# Altium PCB PCB1.PcbDoc
Units mm, origin at the board's own origin, x right, y up, seen from the top; angles counter-clockwise.
Board outline 47.88 x 23.75 mm, 2 copper layers (Top Layer, Bottom Layer); 41 components, 34 nets, 179 pads, 27 vias.
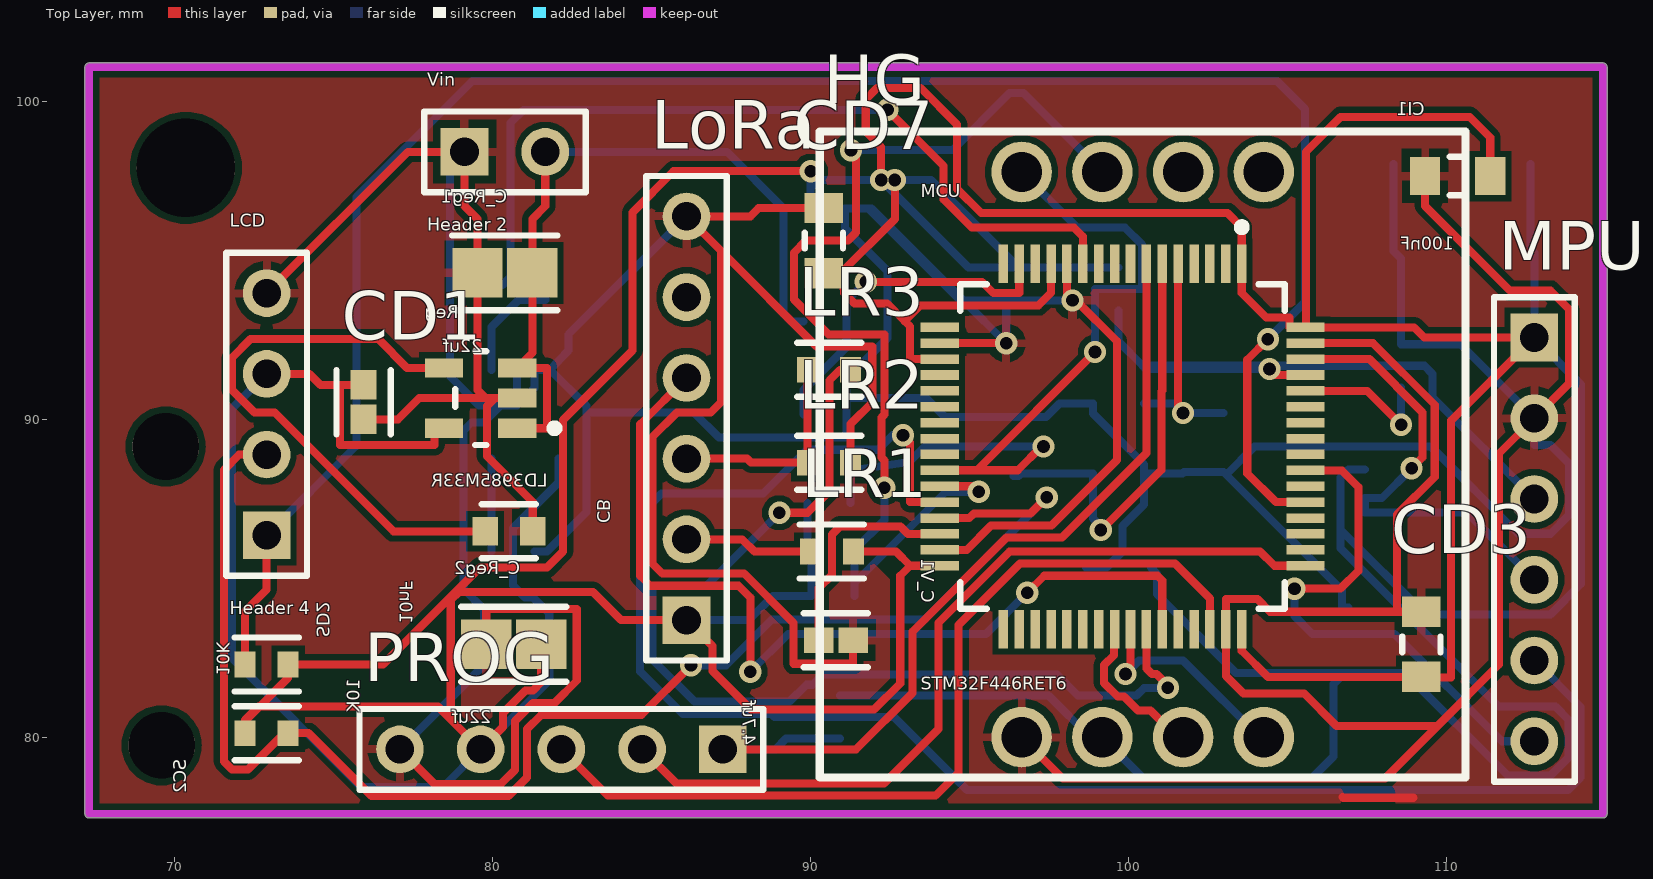
[diagram p0: Top Layer view]
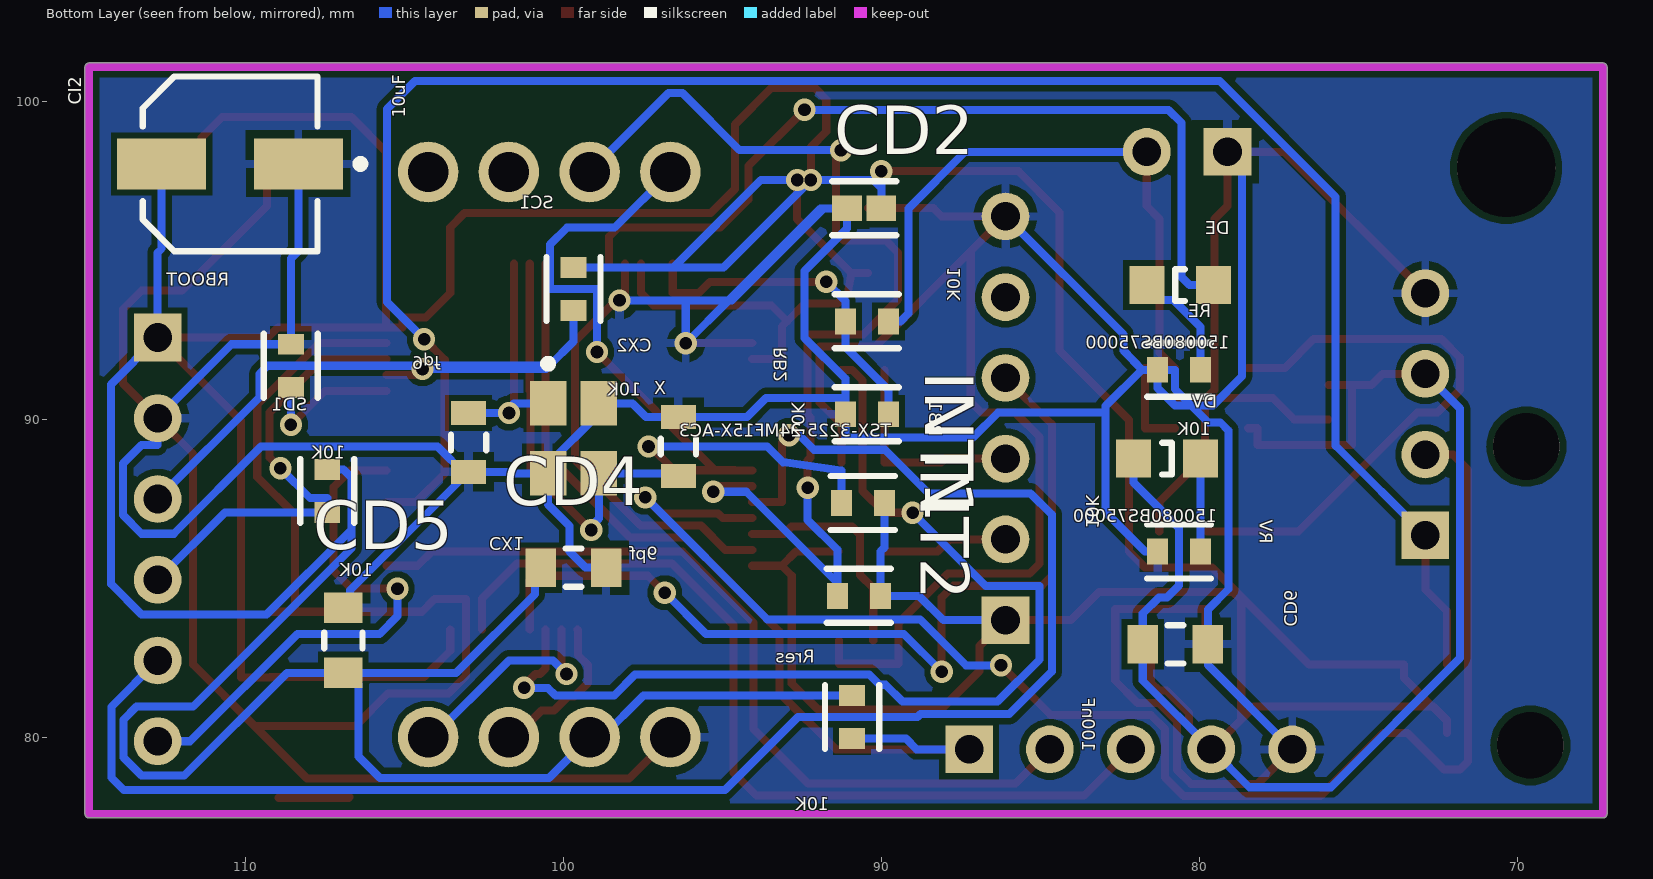
[diagram p1: Bottom Layer view, seen from below]
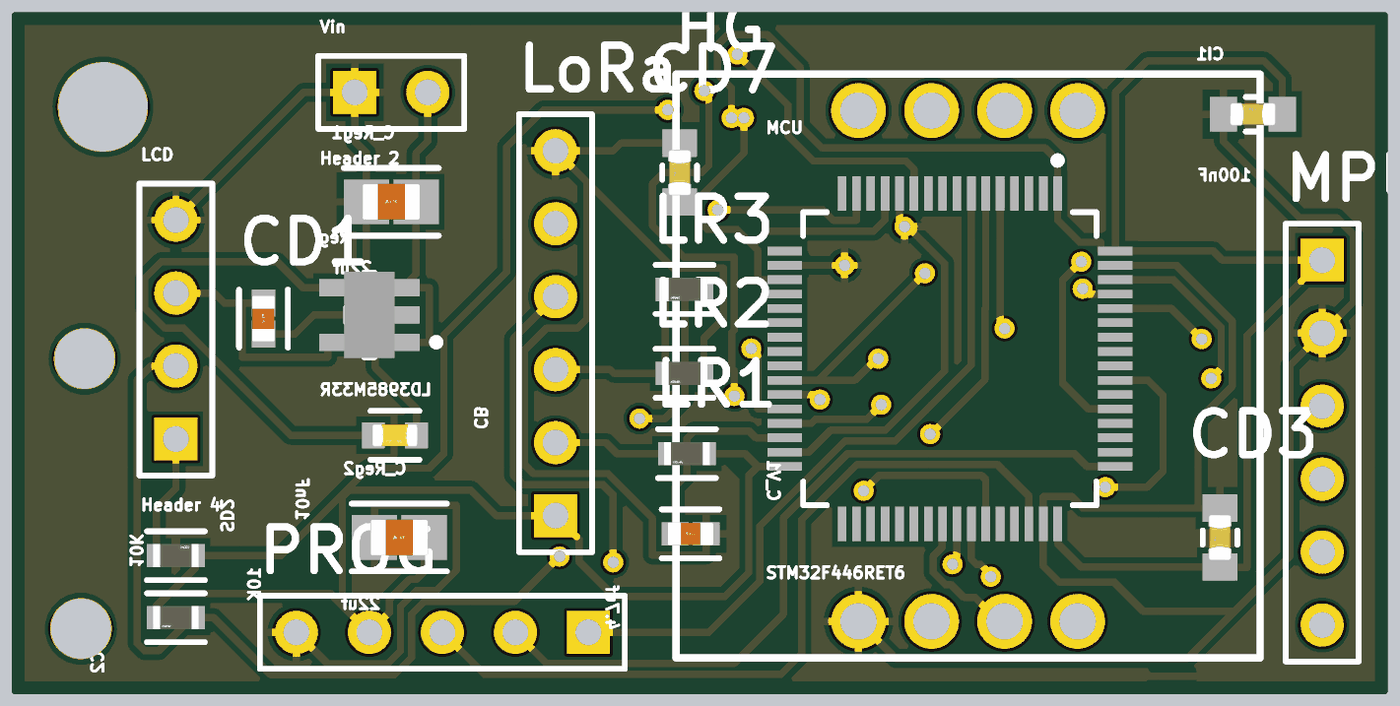
[diagram p2: 3D render of the assembled board from above, using the file's embedded part models]
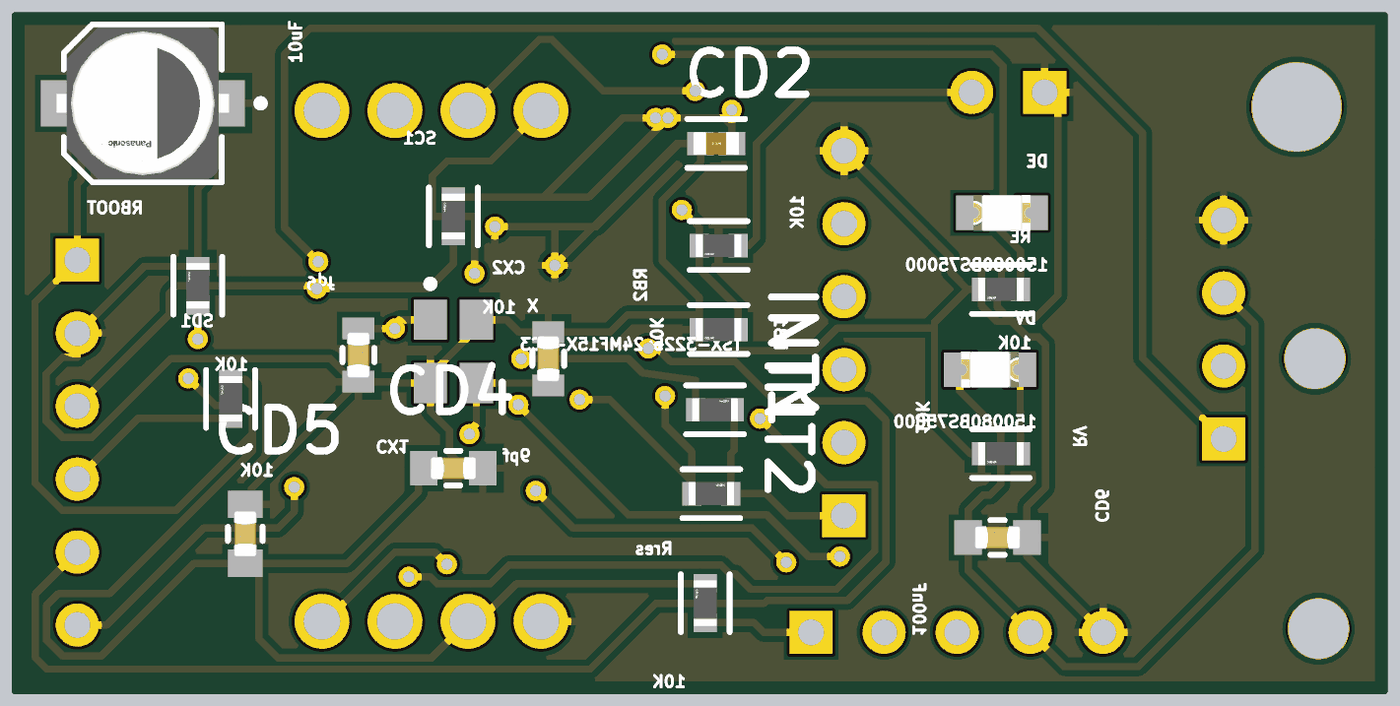
[diagram p3: 3D render of the assembled board from below, using the file's embedded part models]

## Layer stack, top to bottom
Top Solder: solder mask 0.0102, Solder Resist, Dk 3.5
Top Layer: signal copper 0.0356
Dielectric 1: dielectric 0.32, FR-4, Dk 4.8
Bottom Layer: signal copper 0.0356
Bottom Solder: solder mask 0.0102, Solder Resist, Dk 3.5

## Board outline
67.31,77.47 cw(c67.31,77.597) 67.183,77.597 67.183,101.092 cw(c67.31,101.092) 67.31,101.219 114.935,101.219 cw(c114.935,101.092) 115.062,101.092 115.062,77.597 cw(c114.935,77.597) 114.935,77.47

## Design rules (kind name [scope] priority, off if disabled: settings)
Clearance [All] p1: gap=0.2 ignorepadtopadclearanceinfootprint=FALSE except(0.127: Arc-Arc Arc-Track Track-Track SMDPad-SMDPad)
PolygonConnect [All] p1: connectstyle=Relief reliefconductorwidth=0.254 reliefentries=4 polygonreliefangle="90 Angle" airgapwidth=0.254
RoutingVias [All] p1: holewidth=0.4 width=0.7 viastyle="Through Hole" minholewidth=0.4 minwidth=0.7 maxholewidth=0.4 maxwidth=0.7
SolderMaskExpansion [All] p1: expansion=0.102 istentingtop=FALSE
Width [All] p1: maxlimit=0.5 minlimit=0.254 preferedwidth=0.254
30 further rules are at their usual default settings.

## Components (designator, comment, footprint, x,y, rotation, side; value= is the part's Value field where it differs from the comment)
C_Reg1 "22uf" FP-C2012-125-0_2-IPC_A 80.391,94.615 r0 top
C_Reg2 "22uf" FP-C2012-125-0_2-IPC_A 80.67,82.931 r0 top
C_V1 "4.7uf" FP-C1608-080-0_1-IPC_C 90.805,83.058 r0 top
CB "10nF" FP-CC0603-DA-MFG 80.518,86.487 r0 top value="10 nF"
CD1 "4.7uf" FP-C1608-080-0_1-IPC_C 75.946,90.551 r270 top
CD2 "4.7uf" FP-C1608-080-0_1-IPC_C 90.551,96.647 r0 bottom
CD3 "100nF" FP-CGA3E-0_3-0_1-IPC_A 109.22,82.931 r90 top
CD4 "100nF" FP-CGA3E-0_3-0_1-IPC_A 99.695,85.344 r180 bottom
CD5 "100nF" FP-CGA3E-0_3-0_1-IPC_A 106.934,83.058 r90 bottom
CD6 "100nF" FP-CGA3E-0_3-0_1-IPC_A 80.763,82.931 r180 bottom
CD7 "100nF" FP-CGA3E-0_3-0_1-IPC_A 90.424,95.631 r90 top
CI1 "100nF" FP-CGA3E-0_3-0_1-IPC_A 110.363,97.663 r0 top
CI2 "10uF" FP-SC-MFG 110.499,98.044 r0 bottom
CX1 "9pf" FP-CGA3E-0_3-0_1-IPC_B 102.997,89.281 r270 bottom
CX2 "9pf" FP-CGA3E-0_3-0_1-IPC_B 96.393,89.154 r90 bottom
DE "150080BS75000" 0805_A 80.611,94.234 r180 bottom
DV "150080BS75000" 0805_A 81.026,88.773 r0 bottom
HG "Header 4X2" PCBComponent_1 100.457,88.9 r0 top
INT1 "10K" FP-RC0603-0_55-IPC_C 90.593,87.376 r180 bottom
INT2 "10K" FP-RC0603-0_55-IPC_C 90.72,84.455 r180 bottom
LCD "Header 4" HDR1X4 72.898,86.36 r90 top
LoRa "Header 6" HDR1X6 86.106,83.693 r90 top
LR1 "10K" FP-RC0603-0_55-IPC_C 90.678,85.852 r180 top
LR2 "10K" FP-RC0603-0_55-IPC_C 90.593,88.646 r180 top
LR3 "4.7K" FP-RC0603-0_55-IPC_C 90.593,91.567 r180 top
MCU "STM32F446RET6" FP-LQFP64-5W-MFG 99.822,89.154 r270 top
MPU "Header 6" HDR1X6 112.776,92.583 r270 top
PROG "Programmer" HDR1X5 87.249,79.629 r180 top
RB1 "10K" FP-RC0603-0_55-IPC_C 90.466,90.17 r0 bottom
RB2 "10K" FP-RC0603-0_55-IPC_C 90.466,93.091 r0 bottom
RBOOT "10K" FP-RC0603-0_55-IPC_C 108.585,91.694 r90 bottom
RE "10K" FP-RC0603-0_55-IPC_C 80.645,91.567 r0 bottom
Reg "LD3985M33R" FP-SOT23-5L-7049676-MFG 79.629,90.678 r180 top
Rres "10K" FP-RC0603-0_55-IPC_C 90.932,80.645 r90 bottom
RV "10K" FP-RC0603-0_55-IPC_C 80.645,85.852 r0 bottom
SC1 "10K" FP-RC0603-0_55-IPC_C 99.695,94.107 r90 bottom
SC2 "10K" FP-RC0603-0_55-IPC_C 72.898,80.137 r180 top
SD1 "10K" FP-RC0603-0_55-IPC_C 107.442,87.757 r90 bottom
SD2 "10K" FP-RC0603-0_55-IPC_C 72.898,82.296 r0 top
Vin "Header 2" HDR1X2 79.121,98.425 r0 top
X "TSX-3225 24MF15X-AC3" EPSON-TSX-3225_V 99.695,89.408 r270 bottom

## Footprints (in the part's own frame and the unit in brackets; to place one, negate y for a bottom-side part, rotate by r counter-clockwise, add the part's x,y. Pads: shape width x height; smd on the part's side, far side on the other; paste and mask are expansions set on the pad)
0805_A [mm] "Chip LED, 2-Leads, Body 2.0x1.3mm, IPC Medium Density"
  rect 1.1x1.2 smd: 1(-1.05,0) 2(1.05,0)
  silkscreen extent -0.15,-0.5 0.15,0.5, body extent -1,-0.63 1,0.63, height 0.68
EPSON-TSX-3225_V [mm] "SMD, 4-Leads, Body 3.2x2.5mm"
  rect 1.4x1.15 smd: 1(-1.1,-0.8) 2(1.1,-0.8) 3(1.1,0.8) 4(-1.1,0.8)
  silkscreen extent -2.47,-0.93 -2.23,-0.68, body extent -1.6,-1.25 1.6,1.25, height 0.6
FP-C1608-080-0_1-IPC_C [mm]
  rect 0.931x0.812 smd paste+0 mask+0: 1(-0.541,0) 2(0.541,0)
  silkscreen extent -1.01,-0.85 1.01,0.85, body extent -0.8,-0.4 0.8,0.4, height 0.9
FP-C2012-125-0_2-IPC_A [mm]
  rect 1.578x1.556 smd paste+0 mask+0: 1(-0.864,0) 2(0.864,0)
  silkscreen extent -1.65,-1.18 1.65,1.18, body extent -1,-0.63 1,0.63, height 1.45
FP-CC0603-DA-MFG [mm]
  rect 0.8x0.9 smd paste+0 mask+0: 1(-0.75,0) 2(0.75,0)
  silkscreen extent -0.85,-0.85 0.85,0.85, body extent -0.8,-0.4 0.8,0.4, height 0.9
FP-CGA3E-0_3-0_1-IPC_A [mm]
  rect 0.956x1.206 smd paste+0 mask+0: 1(-1.025,0) 2(1.025,0)
  silkscreen extent -0.25,-0.6 0.25,0.6, body extent -2,-1.1 2,1.1, height 0.25
FP-CGA3E-0_3-0_1-IPC_B [mm]
  rect 0.756x1.106 smd paste+0 mask+0: 1(-0.925,0) 2(0.925,0)
  silkscreen extent -0.25,-0.55 0.25,0.55, body extent -0.8,-0.4 0.8,0.4, height 1.1
FP-LQFP64-5W-MFG [mm]
  rect 1.2x0.3 smd paste+0 mask+0: 1(-5.75,3.75) 2(-5.75,3.25) 3(-5.75,2.75) 4(-5.75,2.25) 5(-5.75,1.75) 6(-5.75,1.25) 7(-5.75,0.75) 8(-5.75,0.25) 9(-5.75,-0.25) 10(-5.75,-0.75) 11(-5.75,-1.25) 12(-5.75,-1.75) 13(-5.75,-2.25) 14(-5.75,-2.75) 15(-5.75,-3.25) 16(-5.75,-3.75) 33(5.75,-3.75) 34(5.75,-3.25) 35(5.75,-2.75) 36(5.75,-2.25) 37(5.75,-1.75) 38(5.75,-1.25) 39(5.75,-0.75) 40(5.75,-0.25) 41(5.75,0.25) 42(5.75,0.75) 43(5.75,1.25) 44(5.75,1.75) 45(5.75,2.25) 46(5.75,2.75) 47(5.75,3.25) 48(5.75,3.75)
  rect 0.3x1.2 smd paste+0 mask+0: 17(-3.75,-5.75) 18(-3.25,-5.75) 19(-2.75,-5.75) 20(-2.25,-5.75) 21(-1.75,-5.75) 22(-1.25,-5.75) 23(-0.75,-5.75) 24(-0.25,-5.75) 25(0.25,-5.75) 26(0.75,-5.75) 27(1.25,-5.75) 28(1.75,-5.75) 29(2.25,-5.75) 30(2.75,-5.75) 31(3.25,-5.75) 32(3.75,-5.75) 49(3.75,5.75) 50(3.25,5.75) 51(2.75,5.75) 52(2.25,5.75) 53(1.75,5.75) 54(1.25,5.75) 55(0.75,5.75) 56(0.25,5.75) 57(-0.25,5.75) 58(-0.75,5.75) 59(-1.25,5.75) 60(-1.75,5.75) 61(-2.25,5.75) 62(-2.75,5.75) 63(-3.25,5.75) 64(-3.75,5.75)
  silkscreen extent -7.02,-5.1 5.1,5.1
FP-RC0603-0_55-IPC_C [mm]
  rect 0.659x0.812 smd paste+0 mask+0: 1(-0.677,0) 2(0.677,0)
  silkscreen extent -1.01,-0.85 1.01,0.85, body extent -0.8,-0.4 0.8,0.4, height 0.55
FP-SC-MFG [mm]
  rect 2.8x1.6 smd paste+0 mask+0: 1(-2.15,0) 2(2.15,0)
  silkscreen extent -4.22,-2.75 2.75,2.75, body extent -3,-2.65 3,2.65, height 5.8
FP-SOT23-5L-7049676-MFG [mm]
  rect 1.2x0.6 smd paste+0 mask+0: 1(-1.15,0.95) 2(-1.15,0) 3(-1.15,-0.95) 4(1.15,-0.95) 5(1.15,0.95)
  silkscreen extent -2.45,-1.47 0.8,1.47, body extent -0.87,-1.5 0.88,1.5, height 1.45
HDR1X2 [mm] "Connector; Header; 2 Position"
  rect 1.5x1.5 hole 0.9: 1(0,0)
  round 1.5 hole 0.9: 2(2.54,0)
  silkscreen extent -1.27,-1.27 3.81,1.27
HDR1X4 [mm] "Connector; Header; 4 Position"
  rect 1.5x1.5 hole 0.9: 1(0,0)
  round 1.5 hole 0.9: 2(2.54,0) 3(5.08,0) 4(7.62,0)
  silkscreen extent -1.27,-1.27 8.89,1.27
HDR1X5 [mm] "Connector; Header; 5 Position"
  rect 1.5x1.5 hole 0.9: 1(0,0)
  round 1.5 hole 0.9: 2(2.54,0) 3(5.08,0) 4(7.62,0) 5(10.16,0)
  silkscreen extent -1.27,-1.27 11.43,1.27
HDR1X6 [mm] "Connector; Header; 6 Position"
  rect 1.5x1.5 hole 0.9: 1(0,0)
  round 1.5 hole 0.9: 2(2.54,0) 3(5.08,0) 4(7.62,0) 5(10.16,0) 6(12.7,0)
  silkscreen extent -1.27,-1.27 13.97,1.27
PCBComponent_1 [mil]
  round 75 hole 50: 1(-150,-350) 2(-50,-350) 3(50,-350) 4(150,-350) 5(-150,350) 6(-50,350) 7(50,350) 8(150,350)
  round 74 hole 50: 1(-150,-350) 2(-50,-350) 3(50,-350) 4(150,-350) 5(-150,350) 6(-50,350) 7(50,350) 8(150,350)
  silkscreen extent -400,-400 400,400

## Part data
C_Reg1 C_Reg2: library part CMP-08246-007072-1, "Multilayer Ceramic Capacitors 22μF ±20% 16V X6S SMD 0805", Capacitance=22uF, Case Code (Imperial)=0805, Case Code (Metric)=2012, Dielectric=X6S, Dielectric Material=Ceramic, Max Operating Temperature=105°C, Min Operating Temperature=-55°C, Package Quantity=2000, Tolerance=20%, Voltage Rating=16V, Case/Package=0805, Height=1.25mm, Lead Free="Lead Free", Length=0.079inch, Mount="Surface Mount", Packaging="Tape and Reel", REACH SVHC="No SVHC", RoHS Compliant=Yes, Series=C, Termination=SMD/SMT, Thickness=0.057inch, Voltage Rating (DC)=16V, Weight=0.000194oz, Width=0.049inch
C_V1 CD1 CD2: library part CMP-2000-04981-2, "Multilayer Ceramic Capacitors 4.7μF ±10% 16V X5R SMD 0603", Capacitance=4.7uF, Case Code (Imperial)=0603, Case Code (Metric)=1608, Dielectric=X5R, Dielectric Material=Ceramic, Max Operating Temperature=85°C, Min Operating Temperature=-55°C, Package Quantity=1, Tolerance=10%, Voltage=16V, Case/Package=0603, Construction=Flat, Depth=0.8mm, Height=0.8mm, Lead Free="Lead Free", Length=1.6mm, Mount="Surface Mount", Packaging="Tape and Reel", REACH SVHC="No SVHC", RoHS Compliant=Yes, Series=C, Termination=SMD/SMT, Thickness=0.035inch, Voltage Rating=16V, Voltage Rating (DC)=16V, Weight=7.1E-05oz, Width=0.031inch
CB: library part CMP-2100-03600-2, "CAP CER 10000PF 50V X7R 0603", Capacitance="10 nF", Manufacturer=YAGEO, Manufacturer Part Number=CC0603KRX7R9BB103, Package=CC0603-DA, Temperature="-55°C to +125°C", Temperature Characteristic=X7R, Temperature Coefficient=15%, Temperature Range High=+125°C, Temperature Range Low=-55°C, Tolerance=0.1, Voltage="50 V", Automotive=No, Category=Cap, ComponentLink2Description=Datasheet, ComponentLink2URL=http://www.yageo.com/documents/recent/UPY-GPHC_X7R_6.3V-to-50V_18.pdf, Device Class L1="Passive Components", Device Class L2=Capacitors, Device Class L3="Ceramic Capacitors", Digikey Description="CAP CER 10000PF 50V X7R 0603", Footprint Url=http://www.yageo.com/exep/pages/download/literatures/UPY-C_GEN_24.pdf, Height=0.9mm, Lead Free=Yes, Material=Ceramic, Mouser Description="Multilayer Ceramic Capacitor, CC Series, 0.01 - F, - 10%, X7R, 50 V, 0603 [1608 Metric]", Octopart=https://octopart.com/cc0603krx7r9bb103-yageo-192938, RoHS=TRUE, Voltage Rating="50 V"
CD3 CD4 CD5 CD6 CD7 CI1: library part CMP-2000-07546-2, "Cap Ceramic 100nF 50V X7R 10% Pad SMD 0603 +125°C Automotive T/R", Case Code (Imperial)=0603, Case Code (Metric)=1608, Dielectric=X7R, Max Operating Temperature=125°C, Min Operating Temperature=-55°C, Package Quantity=1, Ratings=AEC-Q200, Tolerance=10%, Voltage=50V, Capacitance=100nF, Case/Package=0603, Composition=Ceramic, Depth=0.8mm, Height=0.8mm, Lead Free="Lead Free", Length=1.6mm, Mount="Surface Mount", Packaging="Tape and Reel", Radiation Hardening=No, REACH SVHC="No SVHC", Termination=SMD/SMT, Thickness=0.035inch, Voltage Rating=50V, Voltage Rating (DC)=50V, Weight=7.1E-05oz, Width=0.8mm
CI2: library part CMP-05427-000087-1, "CAP ALUM 10UF 20% 35V SMD", Case/Package=Radial, Leakage Current=3uA, Max Operating Temperature=85°C, Min Operating Temperature=-40°C, Package Quantity=1, Ripple Current=30mA, Tolerance=20%, Voltage=35V, Capacitance=10uF, Construction=Cylindrical, Contact Plating=Tin, Diameter=5mm, Height=5.4mm, Height - Seated (Max)=0.213inch, Lead Length=2.2mm, Lead Pitch=1.5mm, Length=5.5mm, Life (Hours)=2000Hour, Mount="Surface Mount", Number of Pins=2, Packaging="Tape and Reel", Radiation Hardening=No, REACH SVHC="No SVHC", Ripple Current (AC)=30mA, RoHS Compliant=Yes, Series=S, Termination=SMD/SMT, Voltage Rating=35V, Voltage Rating (DC)=35V, Width=5.3mm
CX1 CX2: library part CMP-08246-000963-1, "Cap Ceramic 9pF 50V C0G 0.5pF Pad SMD 0603 +125°C Automotive T/R", Capacitance=9pF, Case Code (Imperial)=0603, Case Code (Metric)=1608, Dielectric=C0G, Max Operating Temperature=125°C, Min Operating Temperature=-55°C, Package Quantity=4000, Ratings=AEC-Q200, Voltage Rating=50V, Case/Package=0603, Composition=Ceramic, Depth=0.8mm, Height=0.8mm, Length=1.6mm, Mount="Surface Mount", Packaging="Tape and Reel", REACH SVHC="No SVHC", Termination=SMD/SMT, Thickness=0.035inch, Voltage Rating (DC)=50V, Weight=7.1E-05oz, Width=0.031inch
DE DV: library part CMP-1426-00008-1, "SMD mono-color Chip LED, WL-SMCW, Blue", Color=Blue, Manufacturer="Wuerth Elektronik", ComponentLink1Description="Manufacturer URL", ComponentLink1URL=http://www.we-online.com, ComponentLink2Description=Datasheet, ComponentLink2URL=http://katalog.we-online.com/led/datasheet/150080BS75000.pdf, PackageReference=0805_A, PartNumber=150080BS75000
HG: "Header, 4-Pin, Dual row", LatestRevisionDate=17-Jul-2002, LatestRevisionNote="Re-released for DXP Platform.", Publisher="Altium Limited"
INT1 INT2 LR1 LR2 LR3 RB1 RB2 RBOOT RE Rres RV SC1 SC2 SD1 SD2: library part CMP-2100-03664-2, "RES 10K OHM 1% 1/10W 0603", Case Code (Imperial)=0603, Case Code (Metric)=1608, Max Operating Temperature=155°C, Max Power Dissipation=100mW, Min Operating Temperature=-55°C, Resistance=10kR, Resistance Tolerance=1%, Resistor Type="Thick Film", Temperature Coefficient=100ppm/°C, Voltage Rating=75V, Voltage Rating (DC)=50V, Case/Package=0603, Construction=Rectangular, Depth=0.8mm, Features="Moisture Resistant", Height=0.45mm, Lead Free="Lead Free", Lead Pitch=0.3mm, Length=1.6mm, Military Standard=Not, Number of Pins=2, Number of Terminations=2, Packaging="Tape and Reel", Power Rating=100mW, RoHS Compliant=Yes, Series=RC, Size Code=0603, Termination=SMD/SMT, Tolerance=1%, Weight=7.1E-05oz, Width=0.8mm
LCD: "Header, 4-Pin", LatestRevisionDate=17-Jul-2002, LatestRevisionNote="Re-released for DXP Platform.", Publisher="Altium Limited"
LoRa MPU: "Header, 6-Pin", LatestRevisionDate=17-Jul-2002, LatestRevisionNote="Re-released for DXP Platform.", Publisher="Altium Limited"
MCU: library part CMP-12105-000007-1, "IC MCU 32BIT 512KB FLASH 64LQFP", Ambient Temperature Range High=+85°C, Ambient Temperature Range Low=-40°C, Frequency=180MHz, Manufacturer=ST, Max Junction Temp=+105°C, Max Supply Voltage=3.6V, Min Supply Voltage=1.7V, Package=LQFP64-5W, Temperature="-40°C to +105°C", Automotive=No, Category=IC, ComponentLink2Description=Datasheet, ComponentLink2URL=https://www.st.com/en/microcontrollers-microprocessors/stm32f446re.html, Core Architecture="ARM Cortex-M4", Data Bus Width=32bits, Device Class L1="Integrated Circuits (ICs)", Device Class L2="Embedded Processors and Controllers", Device Class L3=Microcontrollers, Digikey Description="IC MCU 32BIT 512KB FLASH 64LQFP", Height=1.6mm, Interface=I2C,SPI,UART,USART,CAN,USB,LIN,IrDA,I2S,Other, Ipc Land Pattern Name=QFP50P1200X1200X160-64, Lead Free=Yes, Manufacturer Part Number=STM32F446RET6, Memory Size=512KBytes, Memory Type=FLASH, Mouser Description="ARM Microcontrollers - MCU High-performance and DSP with FP, ARM Cortex-M4 MCU with 512 Kbytes Flash, 180 MHz CPU, Art Accelerator, SDRAM", Number Of A/D Converters=3, Number Of Adc Channels=16, Number Of Cores=1, Number Of I2C Channels=4, Number Of I/Os=50, Number Of Pwm Channels=32, Number Of Spi Channels=4, Number Of Timers/Counters=14, Number Of Uart Channels=6, Number Of Usb Channels=2, Octopart=https://octopart.com/stm32f446ret6-stmicroelectronics-52642920, Ram Size=128KBytes, RoHS=TRUE, Standoff Height=0.05mm, Temperature Range High=+105°C, Temperature Range Low=-40°C
PROG: library part "Header 5", "Header, 5-Pin", LatestRevisionDate=17-Jul-2002, LatestRevisionNote="Re-released for DXP Platform.", Publisher="Altium Limited"
Reg: library part CMP-0244-00328-2, "IC REG LINEAR 3.3V 150MA SOT23-5", Case/Package=SOT-23, Dropout Voltage=60mV, Input Bias Current=85uA, Max Input Voltage=6V, Max Operating Temperature=125°C, Max Output Current=150mA, Min Current Limit=300mA, Min Input Voltage=2.5V, Min Operating Temperature=-40°C, Min Output Voltage=3.3V, Output Voltage Accuracy=2%, Package Quantity=1, Quiescent Current=150uA, Accuracy=2%, Height=1.3mm, Lead Free="Lead Free", Length=3mm, Mount="Surface Mount", Number Of Outputs=1, Number of Pins=5, Number of Regulators=1, Output Current=150mA, Output Type=Fixed, Output Voltage=3.3V, Packaging="Tape and Reel", Polarity=Positive, Radiation Hardening=No, Width=1.75mm
Vin: "Header, 2-Pin", LatestRevisionDate=17-Jul-2002, LatestRevisionNote="Re-released for DXP Platform.", Publisher="Altium Limited"
X: library part CMP-2000-07333-1, "MHz Range Crystal, 24 MHz, -40 to 85 degC, 4-Pin SMD, RoHS, Tape and Reel", Frequency=24MHz, Frequency Stability=10PPM, Load Capacitance=9pF, Manufacturer=Epson, Operating Temperature Range=-40Cto+85C, Package / Case=3.2mmx2.5mm, Package Description="4-Pin Surface Mount Device, Body 3.2 x 2.5 mm", Package Reference=TSX-3225, Brand=EpsonTiming, Datasheet URL=https://support.epson.biz/td/api/doc_check.php?dl=brief_FA-238V_en.pdf, Datasheet Version=12/2015, Drive Level=200uW, ESR=40Ohms, Factory Pack Quantity=250, Height=0.6mm, Length=3.2mm, Manufacturer URL=https://www.eea.epson.com/, Mounting Style=SMD/SMT, Mounting Technology=SurfaceMount, Packaging=Reel, Product Category=Crystals, RoHS=True, Series=TSX-3225, Termination Style=SMD/SMT, Tolerance=10PPM, Type=Crystal, Unit Weight=0.000564oz, Width=2.5mm

## Free pads (board coordinates)
  oval 3.1x1.524 hole 3.1: 3(70.358,97.917)
  oval 2.1x1.524 hole 2.1: 4(69.723,89.154) 5(69.596,79.756)

## Via types
v1: diameter 0.7, hole 0.4, Top Layer to Bottom Layer, 27 vias

## Nets (pads, with @x,y where several pads share a name; then routed paths per layer and width w, separated by ;. In a path a pad name is that pad's centre, name@x,y a point inside that pad or via, vN(x,y) a via of type N, cw(c..) or ccw(c..) an arc to the next point about the centre after c; other vN are vias at no path point)
+3V3: C_Reg2.2 CD1.1 CD2.1 CD3.1 CD4.1 CD5.1 CD6.1 CD7.1 CI1.2 CI2.2 DV.2 HG.2 INT1.2 INT2.2 LCD.3 LoRa.1 LR1.1 MCU.1 MCU.13 MCU.19 MCU.32 MCU.48 MCU.64 MPU.1 PROG.4 Reg.5 Rres.2 SC1.2 SC2.2 SD1.2 SD2.2 | length 284.6
  Top Layer w0.254: SC2.2 SC2.2@72.221,80.518 ; LCD.3 74.244,91.44 74.593,91.092 75.209,91.092 ; CD1.1 75.209,91.092 ; Reg.5 78.181,89.728 78.181,89.205 75.209,89.205 75.209,91.092 ; C_Reg2.2 81.534,81.737 81.28,81.483 81.041,81.483 80.33,80.772 80.33,80.33 PROG.4 78.689,80.569 ; v1(90.01,97.815) 85.7,97.815 84.404,96.52 84.404,92.177 82.22,89.992 82.22,85.852 81.712,85.344 79.604,85.344 76.556,82.296 SD2.2 73.575,81.871 72.678,80.975 ; CD7.1 CD7.1@90.948,94.606 ; LR1.1 92.694,85.852 93.142,85.404 ; v1(92.227,97.536) 92.227,98.577 91.745,99.06 91.745,100.076 92.1,100.432 93.472,100.432 94.615,99.289 94.615,97.257 95.377,96.495 103.124,96.495 103.572,96.047 MCU.1 103.572,93.98 104.343,93.209 105.071,93.209 105.071,92.904 MCU.64 MCU.64@105.588,92.904 ; v1(92.659,97.536) 92.659,96.317 CD7.1@90.948,94.606 ; MCU.32 93.142,85.404 ; MCU.19 93.142,91.904 93.142,92.924 92.971,93.095 ; MCU.13 97.572,93.991 97.177,93.596 93.472,93.596 92.971,93.095 ; MCU.48 103.572,82.728 104.394,81.906 CD3.1 109.22,81.89 110.16,81.89 110.16,89.967 MPU.1 109.312,92.583 108.991,92.904 MCU.64@105.588,92.904 ; CI1.2 111.388,98.873 110.744,99.517 106.68,99.517 105.588,98.425 MCU.64@105.588,92.904 ; SC2.2@72.221,80.518 72.678,80.975 ; SC2.2@72.221,80.518 72.221,80.552 72.644,80.975 72.678,80.975 ; 72.678,80.975 78.283,80.975 78.689,80.569 ; 78.689,80.569 78.689,84.328 78.943,84.582 83.16,84.582 84.049,83.693 LoRa.1 86.925,82.874 86.925,82.095 88.138,80.882 92.008,80.882 92.828,81.703 92.828,85.09 93.142,85.404 ; CD7.1@90.948,94.606 91.068,93.98 91.393,93.655 92.411,93.655 92.971,93.095
  Bottom Layer w0.254: LCD.3 71.806,90.348 71.806,82.499 75.87,78.435 78.435,78.435 PROG.4 81.788,81.788 CD6.1 81.788,83.896 81.28,84.404 81.026,84.404 80.645,84.785 80.645,86.589 82.076,88.02 DV.2 ; LoRa.1 88.062,83.693 88.824,84.455 INT2.2 90.043,85.852 89.916,85.979 INT1.2 ; CD2.1 90.01,97.282 ; v1(90.01,97.815) 90.01,97.282 ; Rres.2 97.494,81.322 98.806,80.01 99.187,80.01 100.466,78.731 105.782,78.731 106.458,79.407 106.458,81.682 CD5.1@106.809,82.033 ; SC1.2 96.554,94.784 ; CD4.1 100.911,85.153 100.911,84.509 103.387,82.033 CD5.1@106.809,82.033 ; SD1.2 106.934,88.434 106.68,88.18 106.68,86.538 ; CI2.2 112.649,95.377 112.776,95.25 MPU.1 114.249,91.11 114.249,84.836 113.284,83.871 109.347,83.871 106.68,86.538 ; 90.01,97.282 90.264,97.536 v1(92.227,97.536) ; v1(92.227,97.536) 94.98,94.784 96.554,94.784 ; v1(92.227,97.536) v1(92.659,97.536) 93.802,97.536 96.554,94.784 ; 106.68,86.538 106.68,85.954 111.658,80.975 113.436,80.975 113.853,80.559 113.853,79.375 113.284,78.806 111.939,78.806 108.712,82.033 CD5.1 CD5.1@106.809,82.033
ADC0: MCU.15 RB1.1 RB2.2 | length 10.9
  Top Layer w0.254: v1(91.745,94.336) 95.402,94.336 95.761,93.977 96.572,93.977 MCU.15
  Bottom Layer w0.254: RB1.1 89.789,90.932 91.142,92.285 RB2.2 91.142,93.733 v1(91.745,94.336)
GND: C_Reg1.1 C_Reg2.1 C_V1.2 CB.2 CD1.2 CD2.2 CD3.2 CD4.2 CD5.2 CD6.2 CD7.2 CI1.1 CI2.1 CX1.2 CX2.2 HG.1 LCD.4 LoRa.6 LR2.1 MCU.12 MCU.18 MCU.31 MCU.47 MCU.63 MPU.2 PROG.5 RB1.2 RBOOT.2 RE.2 Reg.2 RV.2 Vin.1 X.2 X.4 | length 280.1
  Top Layer w0.254: LCD.4 77.343,98.425 Vin.1 79.121,96.723 79.527,96.317 C_Reg1.1 79.527,90.932 79.781,90.678 ; CD1.2 77.031,90.01 77.699,90.678 79.781,90.678 ; PROG.5 78.181,78.537 80.264,78.537 80.711,78.984 80.711,80.518 81.28,81.087 81.951,81.087 82.652,81.788 82.652,84.049 79.806,84.049 C_Reg2.1 ; Reg.2 80.086,90.678 ; CB.2 81.268,87.413 79.832,88.849 79.832,90.424 80.086,90.678 ; CD7.2 88.376,96.656 88.113,96.393 LoRa.6 87.198,95.301 ; LR2.1 91.269,89.864 91.948,90.543 91.948,92.304 90.195,92.304 87.198,95.301 ; C_V1.2 91.346,82.321 89.472,82.321 89.472,83.604 87.92,85.156 85.344,85.156 85.029,85.471 85.029,89.449 85.801,90.221 86.868,90.221 87.198,90.551 87.198,95.301 ; MCU.31 94.921,85.904 95.686,86.669 97.582,86.669 99.644,88.731 99.644,92.468 98.361,93.751 v1(98.247,93.751) 98.072,93.927 MCU.12 ; MCU.18 v1(96.164,92.404) ; HG.1@96.647,80.01 97.942,78.715 108.077,78.715 109.728,80.366 ; MCU.63 107.705,92.404 109.643,90.466 109.643,88.198 108.458,87.013 108.458,83.956 ; CD3.2 108.458,83.956 ; CI1.1 109.338,96.723 112.005,94.056 113.284,94.056 113.868,93.472 113.868,91.135 MPU.2 111.658,88.925 111.658,82.296 109.728,80.366 ; 79.781,90.678 80.086,90.678 ; 108.458,83.956 104.461,83.956 104.064,84.353 103.072,84.353 MCU.47 103.072,81.94 103.631,81.382 105.537,81.382 106.553,80.366 109.728,80.366
  Bottom Layer w0.254: PROG.5 79.738,82.278 CD6.2 79.738,84.023 79.096,84.666 79.096,89.662 79.35,89.916 79.731,89.916 80.264,90.449 ; Vin.1 78.664,97.968 78.664,91.364 79.578,90.449 80.264,90.449 ; RV.2 81.712,85.852 82.956,87.097 82.956,90.221 ; LoRa.6 82.398,92.685 82.398,92.177 81.813,91.567 ; v1(98.247,93.751) 96.164,93.751 ; CD4.2 99.314,85.344 99.822,85.852 99.822,86.655 100.495,87.328 X.2 ; CD5.2 106.72,84.083 106.72,84.633 CX1.2@103.086,88.267 ; CI2.1 108.349,95.308 108.585,95.072 RBOOT.2 110.448,92.371 MPU.2 112.776,89.205 113.284,89.205 113.868,88.621 113.868,86.995 113.284,86.411 112.268,86.411 109.525,89.154 103.973,89.154 CX1.2@103.086,88.267 ; 80.264,90.449 80.772,90.449 81.322,90.999 RE.2 ; 80.264,90.449 80.772,90.957 80.772,91.567 RE.2 ; RE.2 81.788,91.567 81.813,91.567 ; 81.813,91.567 82.956,90.424 82.956,90.221 ; 82.956,90.221 86.335,90.221 87.122,89.433 91.142,89.433 RB1.2 91.142,90.678 ; 91.142,90.678 93.637,90.678 94.236,90.079 CX2.2 97.409,90.079 97.838,90.508 X.4 98.895,90.195 100.495,88.595 X.2 ; 91.142,90.678 91.142,91.288 92.424,92.569 92.424,94.68 91.092,96.012 CD2.2 91.821,96.647 ; 91.821,96.647 91.921,96.647 94.817,93.751 ; 91.821,96.647 94.717,93.751 94.817,93.751 ; 94.817,93.751 96.164,93.751 ; 94.817,93.751 v1(96.164,92.404) 96.164,93.751 ; X.2 101.702,88.308 101.75,88.356 CX1.2 CX1.2@103.086,88.267
INDICATOR: DE.2 MCU.11 | length 27.3
  Top Layer w0.254: v1(92.431,99.746) 94.196,97.981 94.196,96.92 95.079,96.037 98.298,96.037 98.572,95.763 MCU.11
  Bottom Layer w0.254: DE.2 80.315,94.234 80.569,94.488 80.569,99.339 80.975,99.746 v1(92.431,99.746)
"INT 1": HG.5 INT1.1 MCU.26 | length 25.7
  Top Layer w0.254: MCU.26 94.624,88.404 94.624,88.409 95.241,88.409 ; v1(97.333,89.154) 97.27,89.154 96.525,88.409 95.241,88.409 ; v1(98.958,92.126) 95.241,88.409
  Bottom Layer w0.254: INT1.1 91.269,88.401 93.104,88.659 93.599,89.154 v1(97.333,89.154) ; HG.5@96.647,97.79 98.4,96.037 99.898,96.037 100.432,95.504 100.432,94.107 98.958,94.107 v1(98.958,92.126)
"INT 2": HG.6 INT2.1 MCU.27 | length 34.4
  Top Layer w0.254: v1(91.282,98.476) 91.44,98.318 91.44,95.885 91.186,95.631 89.865,95.631 89.484,95.25 89.484,93.777 90.576,92.685 92.329,92.685 92.329,90.162 92.236,90.069 92.236,88.808 92.329,88.715 v1(92.329,87.859) ; MCU.27 95.128,87.904 v1(95.301,87.732)
  Bottom Layer w0.254: v1(91.282,98.476) 94.471,98.476 96.266,100.27 96.707,100.27 HG.6@99.187,97.79 ; INT2.1 91.396,84.869 ; v1(92.329,87.859) 92.329,86.843 91.396,85.91 91.396,84.869 ; v1(95.301,87.732) 94.259,87.732 91.396,84.869
"INT 3": MCU.28 MPU.5 | length 52.9
  Top Layer w0.254: v1(92.913,89.51) 93.142,89.281 93.142,87.404 MCU.28
  Bottom Layer w0.254: v1(92.913,89.51) 92.583,89.51 92.126,89.052 89.891,89.052 88.519,87.681 85.319,87.681 84.648,87.01 84.648,82.078 85.987,80.739 88.781,80.739 88.875,80.645 92.634,80.645 94.929,78.35 113.844,78.35 114.234,78.74 114.234,80.965 MPU.5
"INT 4": MCU.55 MPU.6 | length 16.8
  Top Layer w0.254: v1(105.232,84.684) 106.68,84.684 107.239,85.242 107.239,87.884 106.719,88.404 MCU.55
  Bottom Layer w0.254: v1(105.232,84.684) 105.232,83.82 105.791,83.261 108.382,83.261 111.76,79.883 MPU.6
"INT 5": MCU.56
M_boot: MCU.60 RBOOT.1 | length 4.6
  Top Layer w0.254: MCU.60 107.521,90.904 v1(108.585,89.84)
  Bottom Layer w0.254: v1(108.585,89.84) RBOOT.1
M_C_V: C_V1.1 MCU.30 | length 7.1
  Top Layer w0.254: C_V1.1 90.264,84.702 90.678,85.115 90.678,86.385 90.932,86.639 92.837,86.639 93.072,86.404 MCU.30
M_X1: CX1.1 MCU.5 X.1 | length 7.5
  Top Layer w0.254: MCU.5 101.572,90.361 v1(101.727,90.206)
  Bottom Layer w0.254: X.1 101.575,90.508 v1@101.877,90.206 ; v1(101.727,90.206) v1@101.877,90.206 ; CX1.1 v1@101.877,90.206
M_X2: CX2.1 MCU.6 X.3 | length 13.6
  Top Layer w0.254: v1(99.136,86.529) 99.153,86.529 101.041,88.417 101.041,90.881 101.072,90.912 MCU.6
  Bottom Layer w0.254: CX2.1 96.544,88.229 96.623,88.308 X.3 98.895,86.891 99.136,86.65 v1(99.136,86.529)
MISO: MCU.22
MOSI: MCU.23
NetCB_1: CB.1 Reg.4 | length 18.1
  Top Layer w0.254: Reg.4 77.318,91.628 76.413,92.532 72.39,92.532 71.806,91.948 71.806,90.932 72.517,90.221 73.152,90.221 76.886,86.487 CB.1
NetDE_1: DE.1 RE.1 | length 3.9
  Bottom Layer w0.254: RE.1 79.968,92.913 80.823,93.768 81.661,93.768 DE.1
NetDV_1: DV.1 RV.1 | length 2.9
  Bottom Layer w0.254: RV.1 79.968,87.3 79.976,87.308 DV.1
NetLoRa_2: LoRa.2 LR1.2 | length 4.1
  Top Layer w0.254: LoRa.2 87.859,86.233 88.24,85.852 LR1.2
NetLoRa_3: LoRa.3 LR2.2 LR3.2 | length 6.8
  Top Layer w0.254: LoRa.3 88.011,88.773 88.138,88.646 LR2.2 LR3.2
NRST: MCU.7 PROG.1 Rres.1 | length 28.1
  Top Layer w0.254: PROG.1 91.44,79.629 93.209,81.398 93.209,83.329 96.169,86.288 97.912,86.288 100.572,88.948 MCU.7
  Bottom Layer w0.254: PROG.1 88.9,79.629 89.239,79.968 Rres.1
RX: LoRa.4 MCU.43 | length 28.7
  Top Layer w0.254: LoRa.4 84.648,89.855 84.648,85.09 84.963,84.775 87.742,84.775 88.113,84.404 v1(88.113,82.067) ; v1(96.825,84.557) 97.358,85.09 100.923,85.09 101.072,84.941 MCU.43
  Bottom Layer w0.254: v1(88.113,82.067) 89.306,83.261 95.529,83.261 v1(96.825,84.557)
SA_IMU: MCU.50
SCK: MCU.21
SCL1: MCU.61 MPU.3 SC1.1 | length 21.8
  Top Layer w0.254: v1(104.445,91.592) 104.633,91.404 MCU.61
  Bottom Layer w0.254: SC1.1 99.695,92.456 100.457,91.694 ; v1(104.445,91.592) 100.559,91.592 100.457,91.694 ; MPU.3 109.576,90.703 109.576,91.44 109.322,91.694 100.457,91.694
SCL2: LCD.2 MCU.29 SC2.1 | length 46.4
  Top Layer w0.254: LCD.2 72.034,88.9 71.552,88.417 71.552,79.248 71.806,78.994 72.314,78.994 73.457,80.137 SC2.1 74.219,80.137 76.2,78.156 80.508,78.156 81.092,78.74 81.092,80.264 81.534,80.706 84.684,80.706 v1(86.248,82.271) ; MCU.29 95,86.904 95.146,87.05 96.931,87.05 v1(97.434,87.554)
  Bottom Layer w0.254: v1(86.248,82.271) 87.342,82.271 88.79,83.718 93.599,83.718 v1(97.434,87.554)
SCL3: HG.4 MCU.41 | length 7.6
  Top Layer w0.254: v1(99.918,82) 99.918,82.12 100.072,82.274 MCU.41
  Bottom Layer w0.254: v1(99.918,82) 100.341,82.423 101.727,82.423 104.267,79.883 104.394,79.883 104.521,79.883 104.394,80.01 HG.4@104.267,80.01
SDA1: MCU.62 MPU.4 SD1.1 | length 14.8
  Top Layer w0.254: MCU.62 107.588,91.904 109.262,90.23 109.262,88.815 v1(108.915,88.468)
  Bottom Layer w0.254: v1(108.915,88.468) 107.975,87.528 107.442,87.528 SD1.1 110.659,87.08 MPU.4
SDA2: LCD.1 MCU.53 SD2.1 | length 62.3
  Top Layer w0.254: SD2.1 72.221,83.972 72.898,84.649 LCD.1 ; v1(104.394,92.532) 103.745,91.883 103.745,88.307 104.648,87.404 MCU.53
  Bottom Layer w0.254: LCD.1 75.717,89.179 75.717,97.003 79.366,100.651 104.682,100.651 105.562,99.771 105.562,93.701 v1(104.394,92.532)
SDA3: HG.3 MCU.40 | length 5
  Top Layer w0.254: MCU.40 99.549,83.381 99.549,82.588 99.241,82.28 99.241,81.719 99.671,81.289 99.871,81.289 100.31,80.851 100.7,80.851 101.541,80.01 HG.3@101.727,80.01
SWCLK: MCU.49 PROG.2 | length 26.5
  Top Layer w0.254: PROG.2 85.786,78.552 92.319,78.552 94.031,80.264 94.031,83.611 96.271,85.852 104.149,85.852 104.597,85.404 MCU.49
SWDIO: MCU.46 PROG.3 | length 28.2
  Top Layer w0.254: PROG.3 83.627,78.171 93.944,78.171 94.666,78.892 94.666,83.541 96.596,85.471 101.473,85.471 102.572,84.372 MCU.46
TX: LR3.1 MCU.42 | length 33.1
  Top Layer w0.254: v1(89.027,87.071) 89.916,87.071 90.602,87.757 90.602,91.237 90.932,91.567 LR3.1 ; MCU.42 100.572,82.175 100.752,81.995 100.891,81.995 101.248,81.638 v1(101.248,81.563)
  Bottom Layer w0.254: v1(89.027,87.071) 86.726,84.77 85.029,84.77 85.029,82.459 86.36,81.128 89.348,81.128 89.882,81.661 90.073,81.661 90.39,81.978 97.758,81.978 98.413,81.323 100.262,81.323 100.503,81.563 v1(101.248,81.563)
Vin: C_Reg1.2 RB2.1 Reg.1 Reg.3 Vin.2 | length 23.2
  Top Layer w0.254: Reg.1 81.712,89.728 81.712,91.628 Reg.3 81.255,92.104 C_Reg1.2 81.255,96.317 81.661,96.723 Vin.2
  Bottom Layer w0.254: Vin.2 87.376,98.425 89.154,96.647 89.154,93.345 89.408,93.091 RB2.1
pads on no net: HG.7 HG.8 LoRa.5 MCU.2 MCU.3 MCU.4 MCU.8 MCU.9 MCU.10 MCU.14 MCU.16 MCU.17 MCU.20 MCU.24 MCU.25 MCU.33 MCU.34 MCU.35 MCU.36 MCU.37 MCU.38 MCU.39 MCU.44 MCU.45 MCU.51 MCU.52 MCU.54 MCU.57 MCU.58 MCU.59
copper on no net: | length 2.2
  Top Layer w0.254: 106.746,78.123 106.764,78.105 108.966,78.105

## Polygon pours and split planes (outlines as drawn)
GND on Bottom Layer "GND_L02_P004" (solid, remove dead copper, pour order 4): 66.167,101.346 115.189,101.346 115.189,77.216 115.062,77.343 65.913,77.343
GND on Top Layer "GND_L01_P005" (solid, remove dead copper, pour order 5): 66.231,101.346 66.485,101.6 115.761,101.6 115.634,101.473 115.634,77.216 66.231,77.216 66.104,77.343

## Keep-outs
Keep-Out Layer:
  lines w0.254: 67.31,77.597 114.935,77.597 114.935,101.092 67.31,101.092 67.31,77.597